# EAGLE board Terrific Curcan (4) (EAGLE 7.6.0)

Size 56.82 x 53.33 mm. Coordinates in mm from the lower left corner, seen from the top.
Outline: 0,0 56.82,0 56.82,53.33 0,53.33 0,0
Copper layers (1*16): Top 0.035mm / dielectric 1.5mm / Bottom 0.035mm
Design rules "default": minimum track width 10mil, minimum drill 24mil, track to track 8mil, track to pad 8mil, pad to pad 8mil, via to via 8mil, smd to smd 8mil, copper to edge 40mil, drill to drill 8mil, minimum pad ring 10mil, minimum via ring 8mil, stop-mask expansion 4mil, vias tented up to drill 0mil, thermal gap 10mil

## Footprints (pad centres in the part's own frame; a part is rotated, then mirrored left to right if it is on the bottom)
PHOTORESISTOR-2.54 = drill 1 pad 1.5: P$1 -1.27,0; P$2 1.27,0
0207/10 = drill 0.813 octagon: 1 -5.08,0; 2 5.08,0
DIL14 = drill 0.813 long: 1 -7.62,-3.81; 2 -5.08,-3.81; 3 -2.54,-3.81; 4 0,-3.81; 5 2.54,-3.81; 6 5.08,-3.81; 7 7.62,-3.81; 8 7.62,3.81; 9 5.08,3.81; 10 2.54,3.81; 11 0,3.81; 12 -2.54,3.81; 13 -5.08,3.81; 14 -7.62,3.81

## Placement (x,y rotation side)
Q1  [PHOTORESISTOR-2.54]  5,10.08 0 top
Q2  [PHOTORESISTOR-2.54]  5,35.48 0 top
Q3  [PHOTORESISTOR-2.54]  5,48.18 0 top
Q4  [PHOTORESISTOR-2.54]  5,60.88 0 top  (outside the outline)
Q5  [PHOTORESISTOR-2.54]  5,73.58 0 top  (outside the outline)
Q6  [PHOTORESISTOR-2.54]  5,86.28 0 top  (outside the outline)
Q7  [PHOTORESISTOR-2.54]  5,98.98 0 top  (outside the outline)
Q8  [PHOTORESISTOR-2.54]  5,111.68 0 top  (outside the outline)
R1  100k‎Ω  [0207/10]  5,22.78 0 top
R2  100k‎Ω  [0207/10]  5,124.38 0 top  (outside the outline)
R3  100k‎Ω  [0207/10]  5,137.08 0 top  (outside the outline)
R4  100k‎Ω  [0207/10]  5,149.78 0 top  (outside the outline)
R5  100k‎Ω  [0207/10]  5,162.48 0 top  (outside the outline)
R6  100k‎Ω  [0207/10]  5,175.18 0 top  (outside the outline)
R7  100k‎Ω  [0207/10]  5,187.88 0 top  (outside the outline)
R8  100k‎Ω  [0207/10]  5,200.58 0 top  (outside the outline)
R9  100k‎Ω  [0207/10]  5,213.28 0 top  (outside the outline)
R10  100k‎Ω  [0207/10]  5,225.98 0 top  (outside the outline)
R11  576k‎Ω  [0207/10]  5,238.68 0 top  (outside the outline)
R12  100k‎Ω  [0207/10]  5,264.08 0 top  (outside the outline)
R13  100k‎Ω  [0207/10]  5,276.78 0 top  (outside the outline)
R14  100k‎Ω  [0207/10]  5,289.48 0 top  (outside the outline)
R15  576k‎Ω  [0207/10]  5,302.18 0 top  (outside the outline)
R16  100k‎Ω  [0207/10]  5,314.88 0 top  (outside the outline)
R17  100k‎Ω  [0207/10]  5,327.58 0 top  (outside the outline)
R18  100k‎Ω  [0207/10]  5,340.28 0 top  (outside the outline)
R19  576k‎Ω  [0207/10]  5,352.98 0 top  (outside the outline)
R20  100k‎Ω  [0207/10]  5,365.68 0 top  (outside the outline)
R21  100k‎Ω  [0207/10]  5,378.38 0 top  (outside the outline)
R22  100k‎Ω  [0207/10]  5,391.08 0 top  (outside the outline)
R23  100k‎Ω  [0207/10]  5,403.78 0 top  (outside the outline)
R24  576k‎Ω  [0207/10]  5,416.48 0 top  (outside the outline)
R26  100k‎Ω  [0207/10]  5,429.18 0 top  (outside the outline)
R27  100k‎Ω  [0207/10]  5,441.88 0 top  (outside the outline)
R28  576k‎Ω  [0207/10]  5,454.58 0 top  (outside the outline)
R29  100k‎Ω  [0207/10]  5,479.98 0 top  (outside the outline)
R30  100k‎Ω  [0207/10]  5,492.68 0 top  (outside the outline)
R31  100k‎Ω  [0207/10]  5,505.38 0 top  (outside the outline)
R32  100k‎Ω  [0207/10]  5,518.08 0 top  (outside the outline)
R33  576k‎Ω  [0207/10]  5,530.78 0 top  (outside the outline)
R34  100k‎Ω  [0207/10]  5,543.48 0 top  (outside the outline)
R35  100k‎Ω  [0207/10]  5,556.18 0 top  (outside the outline)
R36  576k‎Ω  [0207/10]  5,568.88 0 top  (outside the outline)
R37  100k‎Ω  [0207/10]  5,581.58 0 top  (outside the outline)
R38  100k‎Ω  [0207/10]  5,594.28 0 top  (outside the outline)
R39  576k‎Ω  [0207/10]  5,606.98 0 top  (outside the outline)
R40  100k‎Ω  [0207/10]  5,619.68 0 top  (outside the outline)
R41  100k‎Ω  [0207/10]  5,632.38 0 top  (outside the outline)
U1  [DIL14]  5,251.38 0 top  (outside the outline)
U4  [DIL14]  5,467.28 0 top  (outside the outline)

## Library data of the parts
Q1-Q8 R1-R24 R26-R41 U1 U4 = AUTODESK_CIRCUITS_BREADBOARD

## Nets
N$1: Q4.P$2 R4.1 U1.11
N$2: Q8.P$2 R8.1 U4.11
N$3: R11.2 R12.2 U1.2
N$4: R17.1 R18.2 R19.1 U1.8
N$5: R12.1
N$6: R16.1
N$7: R13.1 R14.2 R15.1 U1.6
N$8: R21.1 R24.2 U1.13
N$9: R37.1 R38.2 R39.1 U4.8
N$10: U1.3 U4.3
N$11: R28.2 R29.2 U4.2
N$12: R30.2 R36.2 U4.1
N$13: R31.2 R32.1 R33.1 U4.10
N$14: R29.1
N$15: R30.1
N$16: Q1.P$2 R1.1 U1.5
N$17: R15.2 R16.2 U1.1
N$18: R26.1 R27.2 R28.1 U4.4
N$19: Q1.P$1 Q2.P$1 Q3.P$1 Q4.P$1 Q5.P$1 Q6.P$1 Q7.P$1 Q8.P$1 R9.2 R13.2 R17.2 R22.2 R26.2 R32.2 R34.2
N$20: R34.1 R35.2 R36.1 U4.6
N$21: Q6.P$2 R6.1 U4.7
N$22: R1.2 R2.2 R3.2 R4.2 R5.2 R6.2 R7.2 R8.2 R10.1 R14.1 R18.1 R23.1 R27.1 R31.1 R35.1 R37.2 R38.1
N$23: R33.2 R40.1 U4.13
N$24: R22.1 R23.2 R24.1 U1.10
N$25: Q3.P$2 R3.1 U1.9
N$26: R21.2
N$27: R19.2 R20.1 U1.14
N$28: Q2.P$2 R2.1 U1.7
N$29: R9.1 R10.2 R11.1 U1.4
N$30: Q7.P$2 R7.1 U4.9
N$31: R41.2
N$32: Q5.P$2 R5.1 U4.5
N$33: R39.2 R41.1 U4.14
N$36: U1.12 U4.12
N$37: R20.2
N$38: R40.2

## Tracks (layer width: path | path; a pad name or v marks a point on that pad's centre or on a via)
N$1  (2 unrouted)
N$2  (2 unrouted)
N$3  (2 unrouted)
N$4  (3 unrouted)
N$7  (3 unrouted)
N$8  (2 unrouted)
N$9  (3 unrouted)
N$10  (1 unrouted)
N$11  (2 unrouted)
N$12  (2 unrouted)
N$13  (3 unrouted)
N$16  (2 unrouted)
N$17  (2 unrouted)
N$18  (3 unrouted)
N$19  (14 unrouted)
N$20  (3 unrouted)
N$21  (2 unrouted)
N$22  (16 unrouted)
N$23  (2 unrouted)
N$24  (3 unrouted)
N$25  (2 unrouted)
N$27  (2 unrouted)
N$28  (2 unrouted)
N$29  (3 unrouted)
N$30  (2 unrouted)
N$32  (2 unrouted)
N$33  (2 unrouted)
N$36  (1 unrouted)